# Altium PCB SFCmasterD.PcbDoc (part 1 of 7)
Units mm, origin at the board's own origin, x right, y up, seen from the top; angles counter-clockwise.
Board outline 152.4 x 101.6 mm, 2 copper layers (Top Layer, Bottom Layer); 249 components, 250 nets, 987 pads, 265 vias.
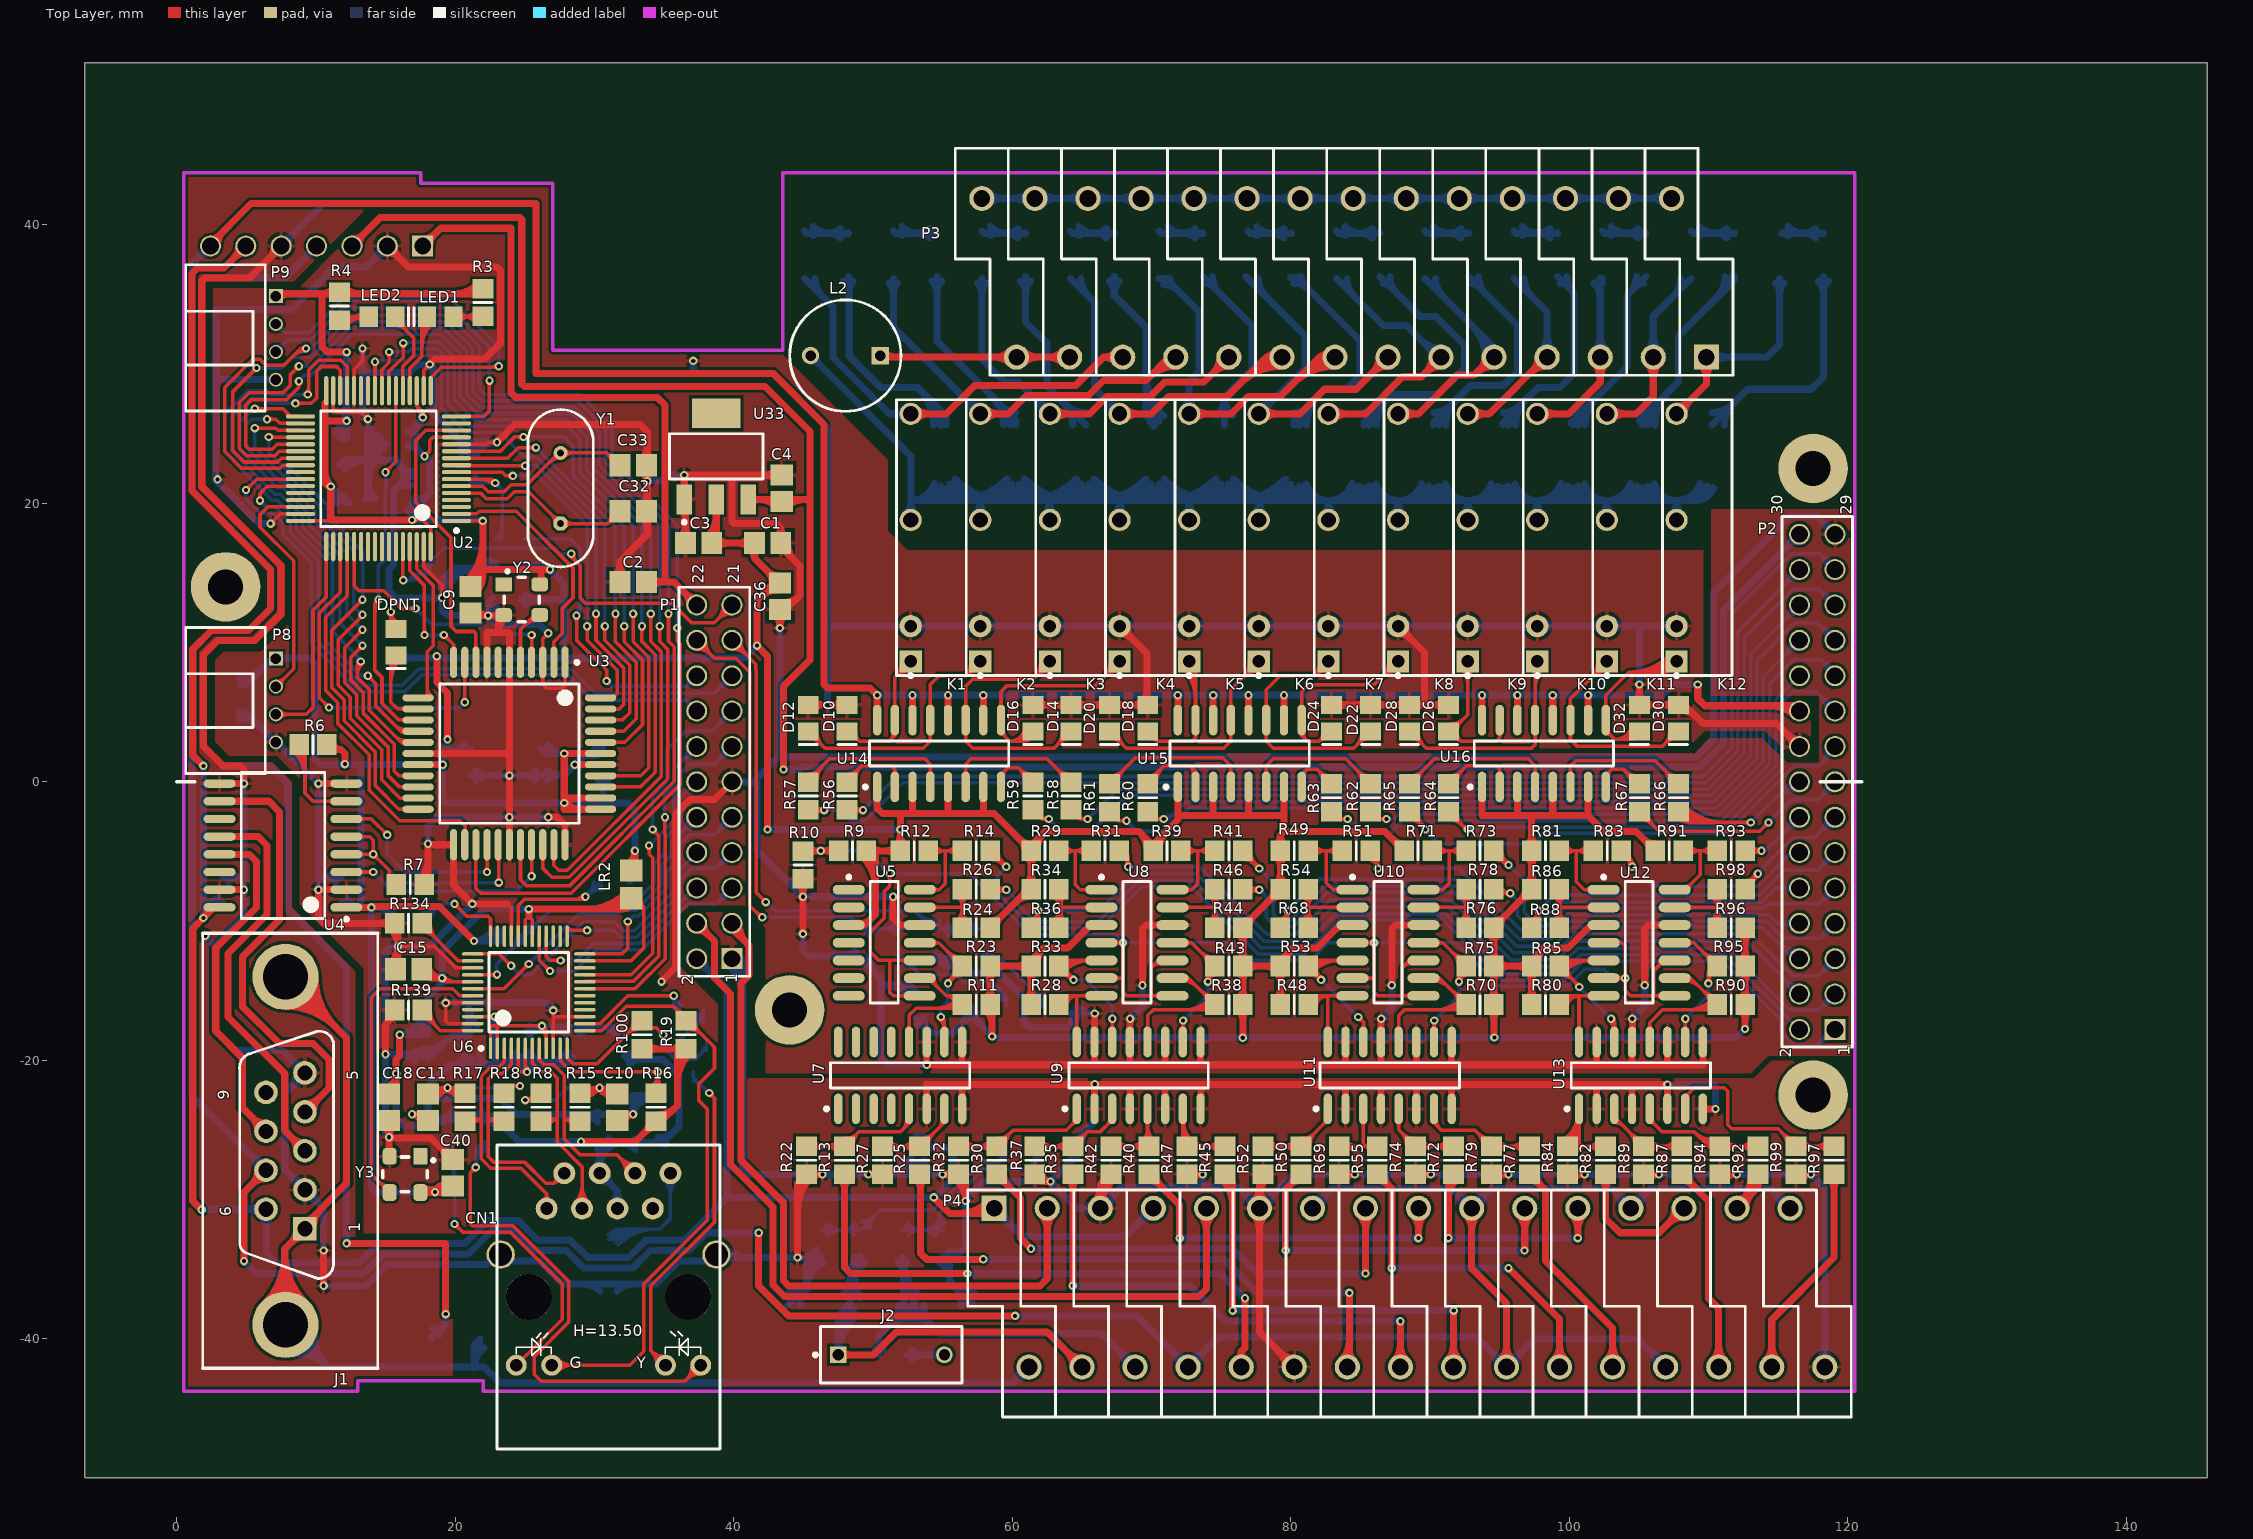
[diagram p0: Top Layer view]
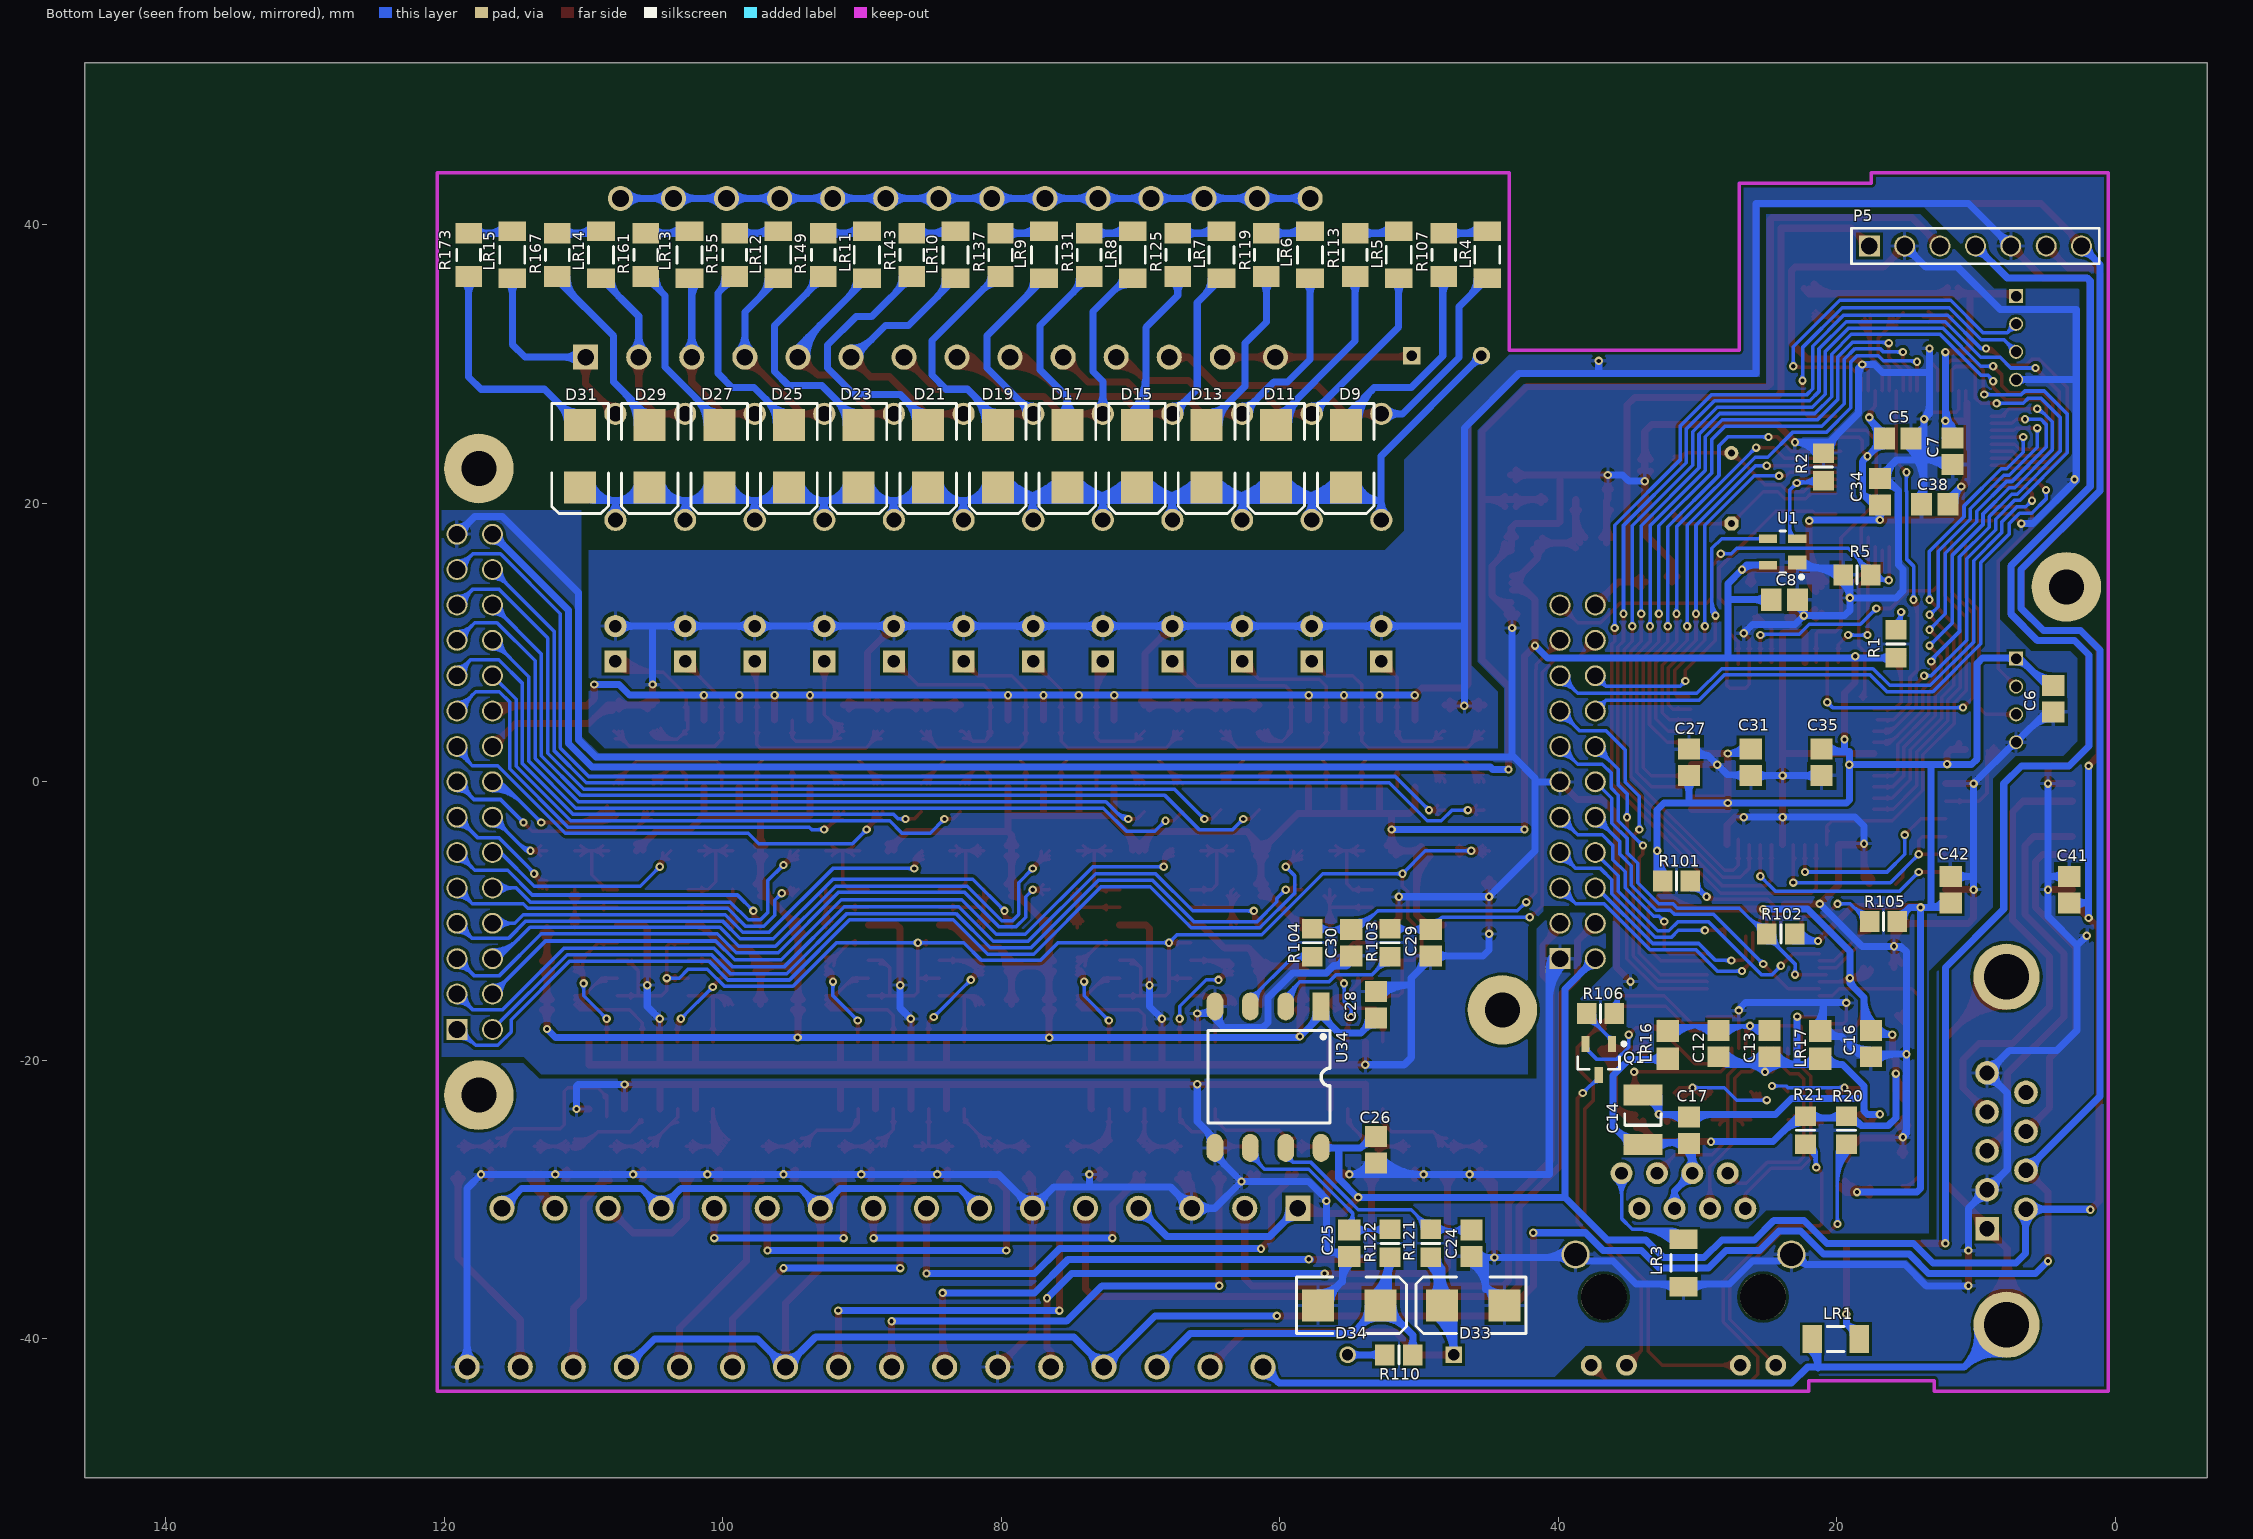
[diagram p1: Bottom Layer view, seen from below]

## Layer stack, top to bottom
Top Solder: solder mask 0.0102, Solder Resist, Dk 3.5
Top Layer: signal copper 0.0356
Dielectric 1: dielectric 0.32, FR-4, Dk 4.8
Bottom Layer: signal copper 0.0356
Bottom Solder: solder mask 0.0102, Solder Resist, Dk 3.5

## Board outline
-6.604,-49.973 145.796,-49.973 145.796,51.627 -6.604,51.627

## Design rules (kind name [scope] priority, off if disabled: settings)
Clearance Clearance_U2 [All] p1: gap=0.2
Clearance Clearance_U6 [InComponent('U6')] p2: gap=0.245
Clearance [All] p3: gap=0.254
ComponentClearance [All] p1: gap=0 collisioncheckmode=3 verticalgap=2540 showdistances=FALSE
PolygonConnect [All] p1: connectstyle=Relief reliefconductorwidth=0.254 reliefentries=4 polygonreliefangle="90 Angle" airgapwidth=0.254
RoutingVias [All] p1: holewidth=0.3 width=0.6 viastyle="Through Hole" minholewidth=0.3 minwidth=0.3 maxholewidth=0.6 maxwidth=0.6
SilkToSilkClearance [All] p1 off: silktosilkclearance=0
SilkToSolderMaskClearance [IsPad] p1 off: minsilkscreentomaskgap=0.254 clearancetoexposedcopper=TRUE
SolderMaskExpansion [All] p1: expansion=0.102
Width Width_U6 [WithinRoom('RoomDefinitionU6')] p1: maxlimit=0.25 minlimit=0.25 preferedwidth=0.25
Width Width_0.508 [InNet('3.3VPHY') or InNet('1.8VPHY') or InNet('AGND') or InNet('3.3V') or InNet('5V') or InNet('5VA') or InNet('1.8VPHY') or InNet('24V') or InNet('FG')or InNet('NetJ1_1') or InNet('GNDA') or InNet('GND') or InNet('VBAT') or InNet('VBAT_SRC') or InNet('VALVE_DRIVER_L') or InNet('VALVE_DRIVER_LO') or InNet('VALVE_DRIVER_N') or InNet('NetD1_2') or InNet('VALVE_DRIVER1_ON') or InNet('VALVE_DRIVER2_ON') or InNet('VALVE_DRIVER3_ON') or InNet('VALVE_DRIVER4_ON') or InNet('VALVE_DRIVER5_ON') or InNet('VALVE_DRIVER6_ON') or InNet('VALVE_DRIVER7_ON') or InNet('VALVE_DRIVER8_ON') or InNet('VALVE_DRIVER9_ON') or InNet('VALVE_DRIVER10_ON') or InNet('VLV_MAIN_DRIVER_ON') or InNet('VLV_DLY_DRIVER_ON')  or InNet('NetLR4_2') or InNet('NetLR5_2') or InNet('NetLR6_2') or InNet('NetLR7_2') or InNet('NetLR8_2') or InNet('NetLR9_2') or InNet('NetLR10_2') or InNet('NetLR11_2') or InNet('NetLR12_2') or InNet('NetLR13_2') or InNet('NetLR14_2') or InNet('NetLR15_2') or InNet('NetD9_1') or InNet('NetD11_1') or InNet('NetD13_1') or InNet('NetD15_1') or InNet('NetD17_1') or InNet('NetD19_1') or InNet('NetD21_1') or InNet('NetD23_1') or InNet('NetD25_1') or InNet('NetD27_1') or InNet('NetD29_1') or InNet('NetD31_1') or InNet('DETECT_PORT1') or InNet('DETECT_PORT2') or InNet('DETECT_PORT3') or InNet('DETECT_PORT4') or InNet('DETECT_PORT5') or InNet('DETECT_PORT6') or InNet('DETECT_PORT7') or InNet('DETECT_PORT8') or InNet('DETECT_PORT9') or InNet('DETECT_PORT10') or InNet('DETECT_PORT11') or InNet('DETECT_PORT12') or InNet('RMT_STARTUP_PORT') or InNet('DP_TIM_CAP_PORT') or InNet('ADC12_PORT') or InNet('ADC13_PORT') or InNet('CANH_PORT') or InNet('CANL_PORT') or InNet('NetJ2_2') or InNet('SHIELD_GND')or InNet('RTS(PIN4)')or InNet('A(PIN8-)')or InNet('B(PIN3+)')] p2: maxlimit=1.2 minlimit=0.25 preferedwidth=0.508
Width [All] p3: maxlimit=0.254 minlimit=0.25 preferedwidth=0.254
27 further rules are at their usual default settings.

## Classes and differential pairs
component class drvinput3: R48 R49 R50 R51 R52 R53 R54 R55 R68 R69 U10 U11
component class drvinput2: R38 R39 R40 R41 R42 R43 R44 R45 R46 R47
component class drvamap: C1 C2 C3 C4 C36 L2 P1 P2 P3 P4 P5 U33
component class drvcomm: C24 C25 C26 C28 C29 C30 C41 C42 D33 D34 J1 J2 LR1 R6 R7 R103 R104 R110 R121 R122 U4 U34
component class drveth: C10 C11 C12 C13 C14 C15 C16 C17 C18 C27 C40 CN1 LR2 LR3 LR16 LR17 Q1 R8 R15 R16 R17 R18 R19 R20 R21 R100 R101 R102 R105 R106 R134 R139 U6 Y3
component class drvinput0: R9 R10 R11 R12 R13 R14 R22 R23 R24 R25 R26 R27 U5 U7
component class drvinput1: R28 R29 R30 R31 R32 R33 R34 R35 R36 R37 U8 U9
component class drvoutput0: D9 D10 D11 D12 K1 K2 LR4 LR5 R56 R57 R107 R113 U14
component class drvoutput1: D13 D14 D15 D16 K3 K4 LR6 LR7 R58 R59 R119 R125
component class drvoutput2: D17 D18 D19 D20 K5 K6 LR8 LR9 R60 R61 R131 R137 U15
component class drvoutput3: D21 D22 D23 D24 K7 K8 LR10 LR11 R62 R63 R143 R149
component class drvoutput4: D25 D26 D27 D28 K9 K10 LR12 LR13 R64 R65 R155 R161 U16
component class drvoutput5: D29 D30 D31 D32 K11 K12 LR14 LR15 R66 R67 R167 R173
component class drvcomdp: C5 C6 C7 C8 C9 C31 C32 C33 C34 C35 C38 DPNT LED1 LED2 P8 P9 R1 R2 R3 R4 R5 U1 U2 U3 Y1 Y2
component class drvinput4: R70 R71 R72 R73 R74 R75 R76 R77 R78 R79
component class drvinput5: R80 R81 R82 R83 R84 R85 R86 R87 R88 R89 U12 U13
component class drvinput6: R90 R91 R92 R93 R94 R95 R96 R97 R98 R99

## Components (designator, comment, footprint, x,y, rotation, side; value= is the part's Value field where it differs from the comment)
C1 "0.1uF" CAPC2012M 42.418,17.145 r180 top
C2 "0.1uF" CAPC2012M 32.766,14.351 r180 top
C3 "10uF" CAPC2012M 37.465,17.145 r0 top
C4 "0.1uF" CAPC2012M 43.434,21.082 r90 top
C5 "0.1uF" CAPC2012M 15.621,24.647 r0 bottom
C6 "0.1uF" CAPC2012M 4.445,5.969 r90 bottom
C7 "0.1uF" CAPC2012M 11.684,23.749 r90 bottom
C8 "0.1uF" CAPC2012M 23.749,13.081 r0 bottom
C9 "0.1uF" CAPC2012M 21.082,13.081 r270 top
C10 "0.1uF" CAPC2012M 31.623,-23.368 r270 top
C11 "0.1uF" CAPC2012M 18.034,-23.368 r270 top
C12 "0.1uF" CAPC2012M 28.48,-18.796 r270 bottom
C13 "0.01uF" CAPC2012M 24.828,-18.796 r270 bottom
C14 "220uF/6.3V" CAPC3528MS 33.909,-24.257 r90 bottom
C15 "0.01uF" CAPC2012M 16.637,-13.462 r180 top
C16 "10uF" CAPC2012M 17.526,-18.796 r270 bottom
C17 "0.01uF" CAPC2012M 30.607,-25.019 r90 bottom
C18 "0.1uF" CAPC2012M 15.24,-23.368 r270 top
C24 "20pF" CAPC2012M 46.228,-33.147 r90 bottom
C25 "20pF" CAPC2012M 54.991,-33.147 r90 bottom
C26 "0.1uF" CAPC2012M 53.086,-26.416 r270 bottom
C27 "0.01uF" CAPC2012M 30.607,1.397 r90 bottom
C28 "0.1uF" CAPC2012M 53.086,-16.002 r90 bottom
C29 "20pF" CAPC2012M 49.149,-11.557 r90 bottom
C30 "20pF" CAPC2012M 54.864,-11.557 r90 bottom
C31 "0.1uF" CAPC2012M 26.162,1.397 r270 bottom
C32 "20pF" CAPC2012M 32.766,19.431 r180 top
C33 "20pF" CAPC2012M 32.766,22.733 r180 top
C34 "0.1uF" CAPC2012M 16.891,20.837 r270 bottom
C35 "0.1uF" CAPC2012M 21.082,1.397 r270 bottom
C36 "0.01uF" CAPC2012M 43.307,13.335 r90 top
C38 "0.1uF" CAPC2012M 12.954,19.939 r180 bottom
C40 "0.1uF" CAPC2012M 19.812,-28.067 r90 top
C41 "0.1uF" CAPC2012M 3.302,-7.747 r90 bottom
C42 "0.1uF" CAPC2012M 11.811,-7.747 r90 bottom
CN1 "HR911105A" HR911105A(RJ-45) 31,-35 r0 top
D9 "SMBJ440CA" SMB 55.245,23.376 r270 bottom
D10 "LL4148" CD2012-0805 48.133,4.572 r270 top
D11 "SMBJ440CA" SMB 60.244,23.376 r270 bottom
D12 "LL4148" CD2012-0805 45.339,4.572 r270 top
D13 "SMBJ440CA" SMB 65.243,23.376 r270 bottom
D14 "LL4148" CD2012-0805 64.22,4.572 r270 top
D15 "SMBJ440CA" SMB 70.243,23.376 r270 bottom
D16 "LL4148" CD2012-0805 61.468,4.572 r270 top
D17 "SMBJ440CA" SMB 75.242,23.376 r270 bottom
D18 "LL4148" CD2012-0805 69.723,4.572 r270 top
D19 "SMBJ440CA" SMB 80.241,23.376 r270 bottom
D20 "LL4148" CD2012-0805 66.971,4.572 r270 top
D21 "SMBJ440CA" SMB 85.24,23.376 r270 bottom
D22 "LL4148" CD2012-0805 85.725,4.572 r270 top
D23 "SMJ440CA" SMB 90.239,23.376 r270 bottom
D24 "LL4148" CD2012-0805 82.931,4.572 r270 top
D25 "SMBJ440CA" SMB 95.238,23.376 r270 bottom
D26 "LL4148" CD2012-0805 91.313,4.572 r270 top
D27 "SMBJ440CA" SMB 100.238,23.376 r270 bottom
D28 "LL4148" CD2012-0805 88.519,4.572 r270 top
D29 "SMBJ440CA" SMB 105.237,23.376 r270 bottom
D30 "LL4148" CD2012-0805 107.823,4.572 r270 top
D31 "SMBJ440CA" SMB 110.236,23.376 r270 bottom
D32 "LL4148" CD2012-0805 105.029,4.572 r270 top
D33 "SMB5.1CA" SMB 46.101,-37.592 r0 bottom
D34 "SMB5.1CA" SMB 54.991,-37.592 r180 bottom
DPNT "Green" CD2012-0805 15.748,10.033 r270 top
J1 "D Connector 9B" DSUB1.385-2H9BL 7.8,-26.5 r90 top locked
J2 "JP_CAN" DS-01 51.308,-41.148 r0 top
K1 "JZC-49FA/024-1H1(555)" JZC-49FA 52.696,17.534 r90 top locked
K2 "JZC-49FA/024-1H1(555)" JZC-49FA 57.696,17.534 r90 top locked
K3 "JZC-49FA/024-1H1(555)" JZC-49FA 62.696,17.534 r90 top locked
K4 "JZC-49FA/024-1H1(555)" JZC-49FA 67.696,17.534 r90 top locked
K5 "JZC-49FA/024-1H1(555)" JZC-49FA 72.696,17.534 r90 top locked
K6 "JZC-49FA/024-1H1(555)" JZC-49FA 77.696,17.534 r90 top locked
K7 "JZC-49FA/024-1H1(555)" JZC-49FA 82.696,17.534 r90 top locked
K8 "JZC-49FA/024-1H1(555)" JZC-49FA 87.696,17.534 r90 top locked
K9 "JZC-49FA/024-1H1(555)" JZC-49FA 92.696,17.534 r90 top locked
K10 "JZC-49FA/024-1H1(555)" JZC-49FA 97.696,17.534 r90 top locked
K11 "JZC-49FA/024-1H1(555)" JZC-49FA 102.696,17.534 r90 top locked
K12 "JZC-49FA/024-1H1(555)" JZC-49FA 107.696,17.534 r90 top locked
L2 "Inductor Iron" CAPPR5-8x8A 48.006,30.607 r180 top
LED1 "Green" CD2012-0805 18.923,33.401 r180 top
LED2 "Green" CD2012-0805 14.732,33.401 r0 top
LR1 "CBW321609U101T" INDC3216M 20.066,-40.005 r0 bottom
LR2 "CBW201209U102T" INDC2012M 32.639,-7.366 r270 top
LR3 "CBW321609U101T" INDC3216M 30.988,-34.544 r270 bottom
LR4 "CBW321609U101T" INDC3216M 45.085,37.846 r90 bottom
LR5 "CBW321609U101T" INDC3216M 51.45,37.846 r90 bottom
LR6 "CBW321609U101T" INDC3216M 57.816,37.846 r90 bottom
LR7 "CBW321609U101T" INDC3216M 64.181,37.846 r90 bottom
LR8 "CBW321609U101T" INDC3216M 70.547,37.846 r90 bottom
LR9 "CBW321609U101T" INDC3216M 76.912,37.846 r90 bottom
LR10 "CBW321609U101T" INDC3216M 83.277,37.846 r90 bottom
LR11 "CBW321609U101T" INDC3216M 89.643,37.846 r90 bottom
LR12 "CBW321609U101T" INDC3216M 96.008,37.846 r90 bottom
LR13 "CBW321609U101T" INDC3216M 102.373,37.846 r90 bottom
LR14 "CBW321609U101T" INDC3216M 108.739,37.846 r90 bottom
LR15 "CBW321609U101T" INDC3216M 115.104,37.846 r90 bottom
LR16 "CBW201209U102T" INDC2012M 32.131,-18.896 r90 bottom
LR17 "CBW201209U102T" INDC2012M 21.177,-18.896 r90 bottom
P1 "Header 11X2" HDR2X11 38.6,0 r90 top locked
P2 "Header 15X2" HDR2X15 117.8,0 r90 top locked
P3 "Header 14X2" DG127A-3.81-14 83.82,36.195 r180 top locked
P4 "Header 16X2" DG127A-3.81-16 88.519,-36.322 r0 top locked
P5 "Header 7" HDR1X7 10.033,38.481 r180 bottom locked
P8 "Header 4" HDR1x4H-2.0 7.112,5.842 r270 top
P9 "Header 4" HDR1x4H-2.0 7.112,31.877 r270 top
Q1 "SS8050" SOT-23_N 37.084,-19.939 r270 bottom
R1 "1K" RESC2012M 15.748,9.906 r270 bottom
R2 "100K" RESC2012M 20.955,22.606 r90 bottom
R3 "1K" RESC2012M 21.971,34.417 r270 top
R4 "1K" RESC2012M 11.684,34.163 r270 top
R5 "100K" RESC2012M 18.542,14.859 r180 bottom
R6 "10K" RESC2012M 9.779,2.667 r180 top
R7 "5.1K" RESC2012M 16.764,-7.366 r180 top
R8 "49.9R%1" RESC2012M 26.162,-23.368 r270 top
R9 "1.5K" RESC2012M 48.514,-4.953 r180 top
R10 "10K" RESC2012M 44.958,-5.969 r270 top
R11 "1K" RESC2012M 57.404,-16.002 r180 top
R12 "4.7K" RESC2012M 52.959,-4.953 r180 top
R13 "5.6K" RESC2012M 47.945,-27.178 r270 top
R14 "300R" RESC2012M 57.404,-4.953 r180 top
R15 "49.9R%1" RESC2012M 28.956,-23.368 r270 top
R16 "10K" RESC2012M 34.417,-23.368 r90 top
R17 "49.9R%1" RESC2012M 20.701,-23.368 r270 top
R18 "49.9R%1" RESC2012M 23.495,-23.368 r270 top
R19 "10K" RESC2012M 36.576,-18.161 r90 top
R20 "510" RESC2012M 19.304,-25.019 r270 bottom
R21 "510" RESC2012M 22.225,-25.019 r270 bottom
R22 "1K" RESC2012M 45.212,-27.178 r90 top
R23 "1K" RESC2012M 57.404,-13.24 r180 top
R24 "4.7K" RESC2012M 57.404,-10.477 r0 top
R25 "5.6K" RESC2012M 53.34,-27.178 r270 top
R26 "300R" RESC2012M 57.404,-7.715 r0 top
R27 "1K" RESC2012M 50.678,-27.178 r90 top
R28 "1K" RESC2012M 62.341,-16.002 r0 top
R29 "4.7K" RESC2012M 62.341,-4.953 r180 top
R30 "5.6K" RESC2012M 58.876,-27.178 r270 top
R31 "300R" RESC2012M 66.659,-4.953 r180 top
R32 "1K" RESC2012M 56.143,-27.178 r90 top
R33 "1K" RESC2012M 62.341,-13.24 r0 top
R34 "4.7K" RESC2012M 62.341,-7.715 r180 top
R35 "5.6K" RESC2012M 64.342,-27.178 r270 top
R36 "300R" RESC2012M 62.341,-10.477 r180 top
R37 "1K" RESC2012M 61.609,-27.178 r90 top
R38 "1K" RESC2012M 75.549,-16.002 r180 top
R39 "4.7K" RESC2012M 71.104,-4.953 r180 top
R40 "5.6K" RESC2012M 69.808,-27.178 r270 top
R41 "300R" RESC2012M 75.549,-4.953 r180 top
R42 "1K" RESC2012M 67.075,-27.178 r90 top
R43 "1K" RESC2012M 75.549,-13.24 r180 top
R44 "4.7K" RESC2012M 75.549,-10.477 r0 top
R45 "5.6K" RESC2012M 75.273,-27.178 r270 top
R46 "300R" RESC2012M 75.549,-7.715 r0 top
R47 "1K" RESC2012M 72.54,-27.178 r90 top
R48 "1K" RESC2012M 80.248,-16.002 r0 top
R49 "4.7K" RESC2012M 80.248,-4.953 r180 top
R50 "5.6K" RESC2012M 80.739,-27.178 r270 top
R51 "300R" RESC2012M 84.693,-4.953 r180 top
R52 "1K" RESC2012M 78.006,-27.178 r90 top
R53 "1K" RESC2012M 80.248,-13.24 r0 top
R54 "4.7K" RESC2012M 80.248,-7.715 r180 top
R55 "5.6K" RESC2012M 86.205,-27.178 r270 top
R56 "300R" RESC2012M 48.133,-1.016 r90 top
R57 "300R" RESC2012M 45.339,-1.016 r90 top
R58 "300R" RESC2012M 64.22,-1.016 r90 top
R59 "300R" RESC2012M 61.468,-1.016 r90 top
R60 "300R" RESC2012M 69.723,-1.143 r90 top
R61 "300R" RESC2012M 66.971,-1.143 r90 top
R62 "300R" RESC2012M 85.725,-1.143 r90 top
R63 "300R" RESC2012M 82.931,-1.143 r90 top
R64 "300R" RESC2012M 91.313,-1.143 r90 top
R65 "300R" RESC2012M 88.519,-1.143 r90 top
R66 "300R" RESC2012M 107.823,-1.143 r90 top
R67 "300R" RESC2012M 105.029,-1.143 r90 top
R68 "300R" RESC2012M 80.248,-10.477 r180 top
R69 "1K" RESC2012M 83.472,-27.178 r90 top
R70 "1K" RESC2012M 93.583,-16.002 r180 top
R71 "4.7K" RESC2012M 89.138,-4.953 r180 top
R72 "5.6K" RESC2012M 91.67,-27.178 r270 top
R73 "300R" RESC2012M 93.583,-4.953 r180 top
R74 "1K" RESC2012M 88.938,-27.178 r90 top
R75 "1K" RESC2012M 93.583,-13.24 r180 top
R76 "4.7K" RESC2012M 93.583,-10.477 r0 top
R77 "5.6K" RESC2012M 97.136,-27.178 r270 top
R78 "300R" RESC2012M 93.583,-7.715 r0 top
R79 "1K" RESC2012M 94.403,-27.178 r90 top
R80 "1K" RESC2012M 98.282,-16.002 r0 top
R81 "4.7K" RESC2012M 98.282,-4.953 r180 top
R82 "5.6K" RESC2012M 102.602,-27.178 r270 top
R83 "300R" RESC2012M 102.727,-4.953 r180 top
R84 "1K" RESC2012M 99.869,-27.178 r90 top
R85 "1K" RESC2012M 98.282,-13.24 r0 top
R86 "4.7K" RESC2012M 98.282,-7.715 r180 top
R87 "5.6K" RESC2012M 108.068,-27.178 r270 top
R88 "300R" RESC2012M 98.282,-10.477 r180 top
R89 "1K" RESC2012M 105.335,-27.178 r90 top
R90 "1K" RESC2012M 111.617,-16.002 r180 top
R91 "4.7K" RESC2012M 107.172,-4.953 r180 top
R92 "5.6K" RESC2012M 113.533,-27.178 r270 top
R93 "300R" RESC2012M 111.617,-4.953 r180 top
R94 "1K" RESC2012M 110.8,-27.178 r90 top
R95 "1K" RESC2012M 111.617,-13.24 r180 top
R96 "4.7K" RESC2012M 111.617,-10.477 r0 top
R97 "5.6K" RESC2012M 118.999,-27.178 r270 top
R98 "300R" RESC2012M 111.617,-7.715 r0 top
R99 "1K" RESC2012M 116.266,-27.178 r90 top
R100 "10K" RESC2012M 33.401,-18.161 r90 top
R101 "10K" RESC2012M 31.496,-7.112 r180 bottom
R102 "10K" RESC2012M 24.003,-10.922 r180 bottom
R103 "5.1R" RESC2012M 52.07,-11.557 r90 bottom
R104 "5.1R" RESC2012M 57.658,-11.557 r90 bottom
R105 "10K" RESC2012M 16.637,-10.033 r0 bottom
R106 "10K" RESC2012M 36.957,-16.637 r0 bottom
R107 "510R" RESC3216M 48.218,37.846 r270 bottom
R110 "120R" RESC2012M 51.435,-41.148 r180 bottom
R113 "510R" RESC3216M 54.583,37.846 r270 bottom
R119 "510R" RESC3216M 60.948,37.846 r270 bottom
R121 "5.1R" RESC2012M 49.149,-33.147 r90 bottom
R122 "5.1R" RESC2012M 52.07,-33.147 r90 bottom
R125 "510R" RESC3216M 67.314,37.846 r270 bottom
R131 "510R" RESC3216M 73.679,37.846 r270 bottom
R134 "10K" RESC2012M 16.637,-10.16 r0 top
R137 "510R" RESC3216M 80.045,37.846 r270 bottom
R139 "6.8K" RESC2012M 16.637,-16.383 r0 top
R143 "510R" RESC3216M 86.41,37.846 r270 bottom
R149 "510R" RESC3216M 92.775,37.846 r270 bottom
R155 "510R" RESC3216M 99.141,37.846 r270 bottom
R161 "510R" RESC3216M 105.506,37.846 r270 bottom
R167 "510R" RESC3216M 111.872,37.846 r270 bottom
R173 "510R" RESC3216M 118.237,37.846 r270 bottom
U1 "MIC811TU" SOT-143_N 23.876,16.51 r0 bottom
U2 "STM32F103RBT6" LQFP64 14.478,22.488 r180 top
U3 "VPC3+C(PQP44)" PQFP44 23.876,2.032 r270 top locked
U4 "ADM2486" RW-16_N 7.62,-4.572 r180 top
U5 "LM2901" SOIC-14AM 50.8,-11.557 r0 top
U6 "DM9161" LQFP48_L 25.273,-15.113 r90 top locked
U7 "PS2801-4" SOIC16_N 51.943,-21.082 r90 top
U8 "LM2901" SOIC-14AM 68.945,-11.557 r0 top
U9 "PS2801-4" SOIC16_N 69.068,-21.082 r90 top
U10 "LM2901" SOIC-14AM 86.979,-11.557 r0 top
U11 "PS2801-4" SOIC16_N 87.102,-21.082 r90 top
U12 "LM2901" SOIC-14AM 105.013,-11.557 r0 top
U13 "PS2801-4" SOIC16_N 105.136,-21.082 r90 top
U14 "PS2801-4" SOIC16_N 54.737,2.032 r90 top
U15 "PS2801-4" SOIC16_N 76.327,2.032 r90 top
U16 "PS2801-4" SOIC16_N 98.171,2.032 r90 top
U33 "ASM1117-3.3" SOT-223 38.735,23.368 r0 top
U34 "ISO1050DUB" SO-8LA 60.833,-21.209 r270 bottom
Y1 "8MHz@20pF" HC-49U 27.559,21.082 r90 top
Y2 "XATLS" X-CP3225 24.765,13.081 r90 top
Y3 "XATLS" X-CP3225 16.383,-28.194 r0 top

## Footprints (in the part's own frame and the unit in brackets; to place one, negate y for a bottom-side part, rotate by r counter-clockwise, add the part's x,y. Pads: shape width x height; smd on the part's side, far side on the other; paste and mask are expansions set on the pad)
CAPC2012M [mm] "Chip Capacitor, Body 2.0x1.3mm, IPC Low Density"
  rect 1.5x1.6 smd: 1(-0.95,0) 2(0.95,0)
  body extent -1.1,-0.72 1.1,0.72, height 1.1
CAPC3528MS [mm] "Chip Capacitor, Body 3.5x2.8mm, IPC Low Density"
  rect 1.5x2.8 smd: 1(-1.778,0) 2(1.778,0)
  silkscreen extent -0.4,-1.3 0.4,1.3, body extent -1.7,-1.35 1.7,1.35, height 1.35
CAPPR5-8x8A [mm] "Inductor, Electrolytic, Radial; Body 8 x 5 mm (Dia.xH typ); Pin Spacing 5 mm (typ)"
  rect 1.25x1.25 hole 0.75: 1(-2.5,0)
  round 1.25 hole 0.75: 2(2.5,0)
  silkscreen extent -4,-4 4,4
CD2012-0805 [mm] "Chip Diode; Body 2.0 x 1.3 mm (LxW typ)"
  rect 1.3x1.5 smd: 1(-0.95,0) 2(0.95,0)
  silkscreen extent 1.9,-0.65 1.9,0.65
DG127A-3.81-14 [mm] "Connector; Header; 14 Position,Pitch 3.81 mm"
  rect 1.8x1.8 hole 1.2: 1(-26.015,5.7)
  round 1.8 hole 1.2: 2(-23.515,-5.7) 3(-22.205,5.7) 4(-19.705,-5.7) 5(-18.395,5.7) 6(-15.895,-5.7) 7(-14.585,5.7) 8(-12.085,-5.7) 9(-10.775,5.7) 10(-8.275,-5.7) 11(-6.965,5.7) 12(-4.465,-5.7) 13(-3.155,5.7) 14(-0.655,-5.7) 15(0.655,5.7) 16(3.155,-5.7) 17(4.465,5.7) 18(6.965,-5.7) 19(8.275,5.7) 20(10.775,-5.7) 21(12.085,5.7) 22(14.585,-5.7) 23(15.895,5.7) 24(18.395,-5.7) 25(19.705,5.7) 26(22.205,-5.7) 27(23.515,5.7) 28(26.015,-5.7)
  silkscreen extent -27.92,-9.3 27.92,7
DG127A-3.81-16 [mm] "Connector; Header; 16 Position,Pitch 3.81 mm"
  rect 1.8x1.8 hole 1.2: 1(-29.825,5.7)
  round 1.8 hole 1.2: 2(-27.325,-5.7) 3(-26.015,5.7) 4(-23.515,-5.7) 5(-22.205,5.7) 6(-19.705,-5.7) 7(-18.395,5.7) 8(-15.895,-5.7) 9(-14.585,5.7) 10(-12.085,-5.7) 11(-10.775,5.7) 12(-8.275,-5.7) 13(-6.965,5.7) 14(-4.465,-5.7) 15(-3.155,5.7) 16(-0.655,-5.7) 17(0.655,5.7) 18(3.155,-5.7) 19(4.465,5.7) 20(6.965,-5.7) 21(8.275,5.7) 22(10.775,-5.7) 23(12.085,5.7) 24(14.585,-5.7) 25(15.895,5.7) 26(18.395,-5.7) 27(19.705,5.7) 28(22.205,-5.7) 29(23.515,5.7) 30(26.015,-5.7) 31(27.325,5.7) 32(29.825,-5.7)
  silkscreen extent -31.73,-9.3 31.73,7
DS-01 [mm] "Dial switch 2 Leads, body 3.91mm(L)x10.0mm(W)x6.6mm(H),pitch 7.62mm"
  rect 1.2x1.2 hole 0.8: 1(-3.81,0)
  round 1.2 hole 0.8: 2(3.81,0)
  silkscreen extent -5.58,-2.03 5.08,2.03
DSUB1.385-2H9BL [mm] "Connector; D Subminiature; 9 Position; Upright  Pitch 1.385 mm"
  rect 1.69x1.69 hole 1.09: 1(-5.596,-1.399)
  round 1.69 hole 1.09: 2(-2.798,-1.399) 3(0,-1.399) 4(2.798,-1.399) 5(5.596,-1.399) 6(-4.197,1.399) 7(-1.399,1.399) 8(1.399,1.399) 9(4.197,1.399)
  round 4.76 hole 3.26: 10(-12.495,0) 11(12.495,0)
  silkscreen extent -15.62,-6.63 15.62,5.94
HC-49U [mm] "Quartz Crystal, Thru-Hole; 2 Leads; Body 11.35 x 4.65 x 13.46 mm (LxWxH max)"
  oct 1x1 hole 0.5: 1(-2.54,0)
  round 1 hole 0.5: 2(2.54,0)
  silkscreen extent -5.65,-2.35 5.65,2.35
HDR1x4H-2.0 [mm] "Connector; Header; 4 Position; Right Angle,Pitch 2.0mm"
  rect 1x1 hole 0.75: 1(-3,0)
  round 1 hole 0.75: 2(-1,0) 3(1,0) 4(3,0)
  silkscreen extent -5.25,-6.48 5.25,-0.76
HDR1X7 [mm] "Connector; Header; 7 Position;Pitch 2.54mm"
  rect 1.5x1.5 hole 1.2: 1(-7.62,0)
  round 1.5 hole 1.2: 2(-5.08,0) 3(-2.54,0) 4(0,0) 5(2.54,0) 6(5.08,0) 7(7.62,0)
  silkscreen extent -8.89,-1.27 8.89,1.27
HDR2X11 [mm] "Connector; Header; 11x2 Position;Pitch 2.54mm"
  rect 1.5x1.5 hole 1.2: 1(-12.7,-1.27)
  round 1.5 hole 1.2: 2(-12.7,1.27) 3(-10.16,-1.27) 4(-10.16,1.27) 5(-7.62,-1.27) 6(-7.62,1.27) 7(-5.08,-1.27) 8(-5.08,1.27) 9(-2.54,-1.27) 10(-2.54,1.27) 11(0,-1.27) 12(0,1.27) 13(2.54,-1.27) 14(2.54,1.27) 15(5.08,-1.27) 16(5.08,1.27) 17(7.62,-1.27) 18(7.62,1.27) 19(10.16,-1.27) 20(10.16,1.27) 21(12.7,-1.27) 22(12.7,1.27)
  silkscreen extent -13.97,-2.54 13.97,2.54
HDR2X15 [mm] "Connector; Header; 15x2 Position;Pitch 2.54mm"
  rect 1.5x1.5 hole 1.2: 1(-17.78,-1.27)
  round 1.5 hole 1.2: 2(-17.78,1.27) 3(-15.24,-1.27) 4(-15.24,1.27) 5(-12.7,-1.27) 6(-12.7,1.27) 7(-10.16,-1.27) 8(-10.16,1.27) 9(-7.62,-1.27) 10(-7.62,1.27) 11(-5.08,-1.27) 12(-5.08,1.27) 13(-2.54,-1.27) 14(-2.54,1.27) 15(0,-1.27) 16(0,1.27) 17(2.54,-1.27) 18(2.54,1.27) 19(5.08,-1.27) 20(5.08,1.27) 21(7.62,-1.27) 22(7.62,1.27) 23(10.16,-1.27) 24(10.16,1.27) 25(12.7,-1.27) 26(12.7,1.27) 27(15.24,-1.27) 28(15.24,1.27) 29(17.78,-1.27) 30(17.78,1.27)
  silkscreen extent -19.05,-2.54 19.05,2.54
HR911105A(RJ-45) [mil] "Single Port RJ45 Connector wtih integated magnetics and LED for 10/100Base-TX NIC aplications"
  round 62 hole 36: 1(-175,171.46) 2(-125,271.46) 3(-75,171.46) 4(-25,271.46) 5(25,171.46) 6(75,271.46) 7(125,171.46) 8(175,271.46)
  round 59.06 hole 36: 9(-260.83,-271.46) 10(-160.83,-271.46) 11(160.83,-271.46) 12(260.83,-271.46)
  round 80 hole 65: 13(305,41.46) 14(-305,41.46)
  round 130 hole 130: HM1(225,-78.54) HM2(-225,-78.54)
  silkscreen extent -315,-509 315,351
INDC2012M [mm] "Chip Inductor, Body 2.0x1.2mm, IPC Low Density"
  rect 1.6x1.6 smd: 1(-1,0) 2(1,0)
  body extent -1.1,-0.7 1.1,0.7, height 1.1
INDC3216M [mm] "Chip Inductor, Body 3.2x1.6mm, IPC Low Density"
  rect 1.4x2 smd: 1(-1.7,0) 2(1.7,0)
  silkscreen extent -0.6,-0.9 0.6,0.9, body extent -1.75,-0.95 1.75,0.95, height 1.9
JZC-49FA [mm] "DIP; Body (LxWxH)20mmx5mmx12.5mm,4 Pins;"
  rect 1.6x1.6 hole 0.9: 1(-8.89,0)
  round 1.6 hole 1.1: 2(1.27,0) 3(8.89,0)
  round 1.6 hole 0.9: 5(-6.35,0)
  silkscreen extent -10.03,-3.98 9.91,1.02
LQFP48_L [mm] "Thin QFP, 48-Leads, Body 7x7mm, Pitch 0.5mm, IPC High Density"
  oval 1.55x0.25 smd: 1(-4.025,2.75) 2(-4.025,2.25) 3(-4.025,1.75) 4(-4.025,1.25) 5(-4.025,0.75) 6(-4.025,0.25) 7(-4.025,-0.25) 8(-4.025,-0.75) 9(-4.025,-1.25) 10(-4.025,-1.75) 11(-4.025,-2.25) 12(-4.025,-2.75) 25(4.025,-2.75) 26(4.025,-2.25) 27(4.025,-1.75) 28(4.025,-1.25) 29(4.025,-0.75) 30(4.025,-0.25) 31(4.025,0.25) 32(4.025,0.75) 33(4.025,1.25) 34(4.025,1.75) 35(4.025,2.25) 36(4.025,2.75)
  oval 0.25x1.55 smd: 13(-2.75,-4.025) 14(-2.25,-4.025) 15(-1.75,-4.025) 16(-1.25,-4.025) 17(-0.75,-4.025) 18(-0.25,-4.025) 19(0.25,-4.025) 20(0.75,-4.025) 21(1.25,-4.025) 22(1.75,-4.025) 23(2.25,-4.025) 24(2.75,-4.025) 37(2.75,4.025) 38(2.25,4.025) 39(1.75,4.025) 40(1.25,4.025) 41(0.75,4.025) 42(0.25,4.025) 43(-0.25,4.025) 44(-0.75,4.025) 45(-1.25,4.025) 46(-1.75,4.025) 47(-2.25,4.025) 48(-2.75,4.025)
  silkscreen extent -4.15,-2.85 2.85,3.55, body extent -3.5,-3.5 3.5,3.5, height 1.6
LQFP64 [mm] "Thin QFP, 64-Leads, Body 10x10mm, Pitch 0.5mm, IPC Low Density"
  oval 2.1x0.3 smd: 1(-5.6,3.75) 2(-5.6,3.25) 3(-5.6,2.75) 4(-5.6,2.25) 5(-5.6,1.75) 6(-5.6,1.25) 7(-5.6,0.75) 8(-5.6,0.25) 9(-5.6,-0.25) 10(-5.6,-0.75) 11(-5.6,-1.25) 12(-5.6,-1.75) 13(-5.6,-2.25) 14(-5.6,-2.75) 15(-5.6,-3.25) 16(-5.6,-3.75) 33(5.6,-3.75) 34(5.6,-3.25) 35(5.6,-2.75) 36(5.6,-2.25) 37(5.6,-1.75) 38(5.6,-1.25) 39(5.6,-0.75) 40(5.6,-0.25) 41(5.6,0.25) 42(5.6,0.75) 43(5.6,1.25) 44(5.6,1.75) 45(5.6,2.25) 46(5.6,2.75) 47(5.6,3.25) 48(5.6,3.75)
  oval 0.3x2.1 smd: 17(-3.75,-5.6) 18(-3.25,-5.6) 19(-2.75,-5.6) 20(-2.25,-5.6) 21(-1.75,-5.6) 22(-1.25,-5.6) 23(-0.75,-5.6) 24(-0.25,-5.6) 25(0.25,-5.6) 26(0.75,-5.6) 27(1.25,-5.6) 28(1.75,-5.6) 29(2.25,-5.6) 30(2.75,-5.6) 31(3.25,-5.6) 32(3.75,-5.6) 49(3.75,5.6) 50(3.25,5.6) 51(2.75,5.6) 52(2.25,5.6) 53(1.75,5.6) 54(1.25,5.6) 55(0.75,5.6) 56(0.25,5.6) 57(-0.25,5.6) 58(-0.75,5.6) 59(-1.25,5.6) 60(-1.75,5.6) 61(-2.25,5.6) 62(-2.75,5.6) 63(-3.25,5.6) 64(-3.75,5.6)
  silkscreen extent -5.72,-4.15 4.15,4.57
PQFP44 [mm] "QFP, 44-Leads, Body 10x10mm, Pitch 0.8mm, IPC Low Density"
  oval 2.25x0.508 smd: 1(-6.55,4) 2(-6.55,3.2) 3(-6.55,2.4) 4(-6.55,1.6) 5(-6.55,0.8) 6(-6.55,0) 7(-6.55,-0.8) 8(-6.55,-1.6) 9(-6.55,-2.4) 10(-6.55,-3.2) 11(-6.55,-4) 23(6.55,-4) 24(6.55,-3.2) 25(6.55,-2.4) 26(6.55,-1.6) 27(6.55,-0.8) 28(6.55,0) 29(6.55,0.8) 30(6.55,1.6) 31(6.55,2.4) 32(6.55,3.2) 33(6.55,4)
  oval 0.508x2.25 smd: 12(-4,-6.55) 13(-3.2,-6.55) 14(-2.4,-6.55) 15(-1.6,-6.55) 16(-0.8,-6.55) 17(0,-6.55) 18(0.8,-6.55) 19(1.6,-6.55) 20(2.4,-6.55) 21(3.2,-6.55) 22(4,-6.55) 34(4,6.55) 35(3.2,6.55) 36(2.4,6.55) 37(1.6,6.55) 38(0.8,6.55) 39(0,6.55) 40(-0.8,6.55) 41(-1.6,6.55) 42(-2.4,6.55) 43(-3.2,6.55) 44(-4,6.55)
  silkscreen extent -6.67,-5 5,5, body extent -5,-5 5,5, height 2.5
RESC2012M [mm] "Chip Resistor, Body 2.0x1.3mm, IPC Low Density"
  rect 1.4x1.5 smd: 1(-1,0) 2(1,0)
  silkscreen extent 0,-0.65 0,0.65, body extent -1.07,-0.7 1.07,0.7, height 0.65
RESC3216M [mm] "Chip Resistor, Body 3.2x1.6mm, IPC Low Density"
  rect 1.5x1.9 smd: 1(-1.55,0) 2(1.55,0)
  silkscreen extent -0.4,-0.85 0.4,0.85, body extent -1.68,-0.87 1.68,0.87, height 0.71
RW-16_N [mm] "SOIC, 16-Leads, Body 10.3x7.5mm, Pitch 1.27mm, IPC Medium Density"
  oval 2.3x0.6 smd: 1(-4.55,4.445) 2(-4.55,3.175) 3(-4.55,1.905) 4(-4.55,0.635) 5(-4.55,-0.635) 6(-4.55,-1.905) 7(-4.55,-3.175) 8(-4.55,-4.445) 9(4.55,-4.445) 10(4.55,-3.175) 11(4.55,-1.905) 12(4.55,-0.635) 13(4.55,0.635) 14(4.55,1.905) 15(4.55,3.175) 16(4.55,4.445)
  silkscreen extent -4.67,-5.25 3,5.42, body extent -3.75,-5.15 3.75,5.15, height 2.65
SMB [mm] "DO-214-AA/SMB; 2 C-Bend Leads; Body 5.3 x 3.6 mm, inc. leads (LxW)"
  rect 2.3x2.3 smd: 1(-2.25,0) 2(2.25,0)
  silkscreen extent -3.8,-2.03 4.1,2.03
SO-8LA [mm] "body=9.6mmx6.5mm(LxW),pitch=2.54mm"
  rect 2x1.2 smd: 1(-5.08,3.81)
  oval 2x1.2 smd: 2(-5.08,1.27) 3(-5.08,-1.27) 4(-5.08,-3.81) 5(5.08,-3.81) 6(5.08,-1.27) 7(5.08,1.27) 8(5.08,3.81)
  silkscreen extent -3.36,-4.32 3.3,4.45
SOIC16_N [mm] "SOIC, 16-Leads, Body 9.9x3.9mm, Pitch 1.27mm, IPC Medium Density"
  oval 2.2x0.6 smd: 1(-2.4,4.445) 2(-2.4,3.175) 3(-2.4,1.905) 4(-2.4,0.635) 5(-2.4,-0.635) 6(-2.4,-1.905) 7(-2.4,-3.175) 8(-2.4,-4.445) 9(2.4,-4.445) 10(2.4,-3.175) 11(2.4,-1.905) 12(2.4,-0.635) 13(2.4,0.635) 14(2.4,1.905) 15(2.4,3.175) 16(2.4,4.445)
  silkscreen extent -2.52,-5 0.9,5.42, body extent -2,-5 2,5, height 1.91
SOIC-14AM [mm] "SOIC, 14-Leads, Body 8.75x4mm, Pitch 1.27mm, IPC Low Density"
  oval 2.3x0.7 smd: 1(-2.55,3.81) 2(-2.55,2.54) 3(-2.55,1.27) 4(-2.55,0) 5(-2.55,-1.27) 6(-2.55,-2.54) 7(-2.55,-3.81) 8(2.55,-3.81) 9(2.55,-2.54) 10(2.55,-1.27) 11(2.55,0) 12(2.55,1.27) 13(2.55,2.54) 14(2.55,3.81)
  silkscreen extent -2.67,-4.32 1,4.83, body extent -2,-4.32 2,4.41, height 2.72
SOT-23_N [mm] "SOT23, 3-Leads, Body 2.9x1.3mm, Pitch 0.95mm, Lead Span 2.5mm, IPC Medium Density"
  rect 1.15x0.6 smd: 1(-1.125,0.95) 2(-1.125,-0.95) 3(1.125,0)
  silkscreen extent -1.25,-1.5 0.7,1.92, body extent -0.7,-1.5 0.7,1.5, height 1.1
SOT-143_N [mm] "SOT143, 4-Leads, Body 2.9x1.3mm, Pitch 1.9mm, Lead Span 2.5mm, IPC Medium Density"
  rect 1.3x1 smd: 1(-1.05,0.75)
  rect 1.3x0.6 smd: 2(-1.05,-0.95) 3(1.05,-0.95) 4(1.05,0.95)
  silkscreen extent -1.47,-1.5 0.2,1.92, body extent -0.7,-1.52 0.7,1.52, height 1.1
SOT-223 [mm] "SOT-223/SC-73; 4 Leads; Body 6.7 x 7.3 mm, inc. leads (LxW max)"
  rect 1.1x2.15 smd: 1(-2.3,-3.1) 2(0,-3.1) 3(2.3,-3.1)
  rect 3.5x2.15 smd: 4(0,3.1)
  silkscreen extent -3.35,-4.85 3.35,1.63
X-CP3225 [mm] "SMT Oscillator body 3.2mmx2.5mm"
  rrect10% 1x1.2 smd: 1(1.1,1.3)
  rrect50% 1x1.2 smd: 2(-1.1,1.3) 3(-1.1,-1.3) 4(1.1,-1.3)
  silkscreen extent -1.6,-1.25 2.13,1.25, body extent -1.6,-1.27 1.6,1.25, height 1

## Part data
C1 C2 C3 C4 C5 C6 C7 C8 C9 C10 C11 C12 C13 C15 C16 C17 C18 C24 C25 C26 C27 C28 C29 C30 C31 C32 C33 C34 C35 C36 C38 C40 C41 C42: library part Cap, "Capacitor"
C14: library part "Cap Pol1", "Polarized Capacitor (Radial)"
D9 D11 D13 D15 D17 D19 D21 D23 D25 D27 D29 D31 D33 D34: library part "Bi-dir TVS Diode", "Bi-dir TVS Diode"
D10 D12 D14 D16 D18 D20 D22 D24 D26 D28 D30 D32: library part "Diode 1N4007", "1 Amp General Purpose Rectifier"
DPNT LED1 LED2: library part LED1, "Green LED,Output indicate."
J1: "Receptacle Assembly, 9 Position, Upright"
J2: library part JK2H, "'Dial Switch pitch 7.62mm"
K1 K2 K3 K4 K5 K6 K7 K8 K9 K10 K11 K12: library part JZC-49FA, "Intermediate  Power  Relay"
L2: "Magnetic-Core Inductor"
LR1 LR2 LR3 LR4 LR5 LR6 LR7 LR8 LR9 LR10 LR11 LR12 LR13 LR14 LR15 LR16 LR17: library part BLM10/11/21/31/41, "EMI FILTERS,DC Resistance max.0.05~1.5 ohms,10 ~ 1000 ohms at 100MHz  Frequency"
P1: "Header, 11-Pin, Dual row"
P2: "Header, 15-Pin, Dual row"
P3: "Header, 14-Pin, Dual row"
P4: "Header, 16-Pin, Dual row"
P5: "Header, 7-Pin"
P8 P9: "Header, 4-Pin"
Q1: library part PMMT491A, "NPN BISS Transistor"
R1 R2 R3 R4 R5 R6 R7 R8 R9 R10 R11 R12 R13 R14 R15 R16 R17 R18 R19 R20 R21 R22 R23 R24 R25 R26 R27 R28 R29 R30 R31 R32 R33 R34 R35 R36 R37 R38 R39 R40 R41 R42 R43 R44 R45 R46 R47 R48 R49 R50 R51 R52 R53 R54 R55 R56 R57 R58 R59 R60 R61 R62 R63 R64 R65 R66 R67 R68 R69 R70 R71 R72 R73 R74 R75 R76 R77 R78 R79 R80 R81 R82 R83 R84 R85 R86 R87 R88 R89 R90 R91 R92 R93 R94 R95 R96 R97 R98 R99 R100 R101 R102 R103 R104 R105 R106 R110 R121 R122 R134 R139: library part Res1, "Resistor"
R107 R113 R119 R125 R131 R137 R143 R149 R155 R161 R167 R173: library part Res1, "Metal film Resistor"
U1: library part MAX811-EUS-T, "4-Pin 礟 Voltage Monitors with Manual Reset Input"
U2: "STM32 ARM-based 32-bit MCU with 128 Kbytes Flash, 64-pin LQFP, Industrial Temperature"
U3: "a communication chip with processor interface for  intelligent PROFIBUS DP-Slave applications"
U4: "Isolated RS-485 Transceiver"
U5 U8 U10 U12: "4通道差分比较器芯片"
U6: "网络芯片"
U7 U9 U11 U13 U14 U15 U16: "The PS2801-1 and PS2801-4 are optically coupled isolators containing a GaAs light emitting diode and an NPN  silicon phototransistor in a plastic SOP for high density applications."
U33: library part LM1117T-5.0, "800mA Low-Dropout Linear Regulator"
U34: "隔离型CAN接口芯片"
Y1: library part XTAL, "Crystal Oscillator"
Y2 Y3: "贴片有源晶振"

## Free pads (board coordinates)
  round 5 hole 2.5: 0(3.5,14) 0(44,-16.38) 0(117.5,-22.5) 0(117.5,22.5)

## Via types
v1: diameter 0.6, hole 0.3, Top Layer to Bottom Layer, 265 vias

## Nets (pads, with @x,y where several pads share a name; then routed paths per layer and width w, separated by ;. In a path a pad name is that pad's centre, name@x,y a point inside that pad or via, vN(x,y) a via of type N, cw(c..) or ccw(c..) an arc to the next point about the centre after c; other vN are vias at no path point)
1.8VPHY: C14.1 C17.1 CN1.4 CN1.5 LR16.1 | length 35.3
  Bottom Layer w0.5: CN1.4@29.985,-27.725 ccw(c29.068,-26.808) 30.365,-26.808 ccw(c31.662,-26.808) CN1.4@30.745,-27.725 ; C17.1@30.203,-26.323 cw(c29.813,-26.713) C17.1@30.365,-26.713 ; CN1.4@30.365,-28.642 cw(c30.365,-29.94) 31.282,-29.022 cw(c32.2,-28.105) CN1.4@30.902,-28.105 ; CN1.4@30.365,-27.64 cw(c32.228,-27.64) C17.1@30.911,-26.323 ; C17.1@31.011,-26.323 cw(c32.011,-27.323) 32.011,-25.908 ; C17.1@31.011,-25.615 ccw(c31.717,-24.909) 31.717,-25.908 ; CN1.5@31.261,-30.259 ccw(c30.403,-29.375) 31.635,-29.375 ; CN1.5@31.635,-30.645 31.635,-29.375 ; 31.745,-25.908 cw(c31.745,-27.549) C14.1@32.905,-26.389 ; CN1.5@32.009,-30.259 cw(c32.867,-29.375) 31.635,-29.375 ; LR16.1@32.131,-19.685 32.385,-19.939 34.925,-19.939 36.068,-21.082 36.068,-24.765 34.925,-25.908 30.541,-25.908 30.353,-26.096 30.365,-26.108 CN1.4@30.365,-28.105 31.635,-29.375 ; 32.359,-25.908 ccw(c32.359,-25.135) C14.1@32.905,-25.681 ; LR16.1@32.52,-20.285 cw(c33.355,-21.12) 33.355,-19.939 ; LR16.1@32.52,-19.507 ccw(c33.563,-18.464) 33.563,-19.939 ; C14.1@34.559,-25.535 ccw(c34.559,-23.751) 35.821,-25.012 ; C14.1@35.059,-26.035 cw(c35.689,-26.035) C14.1@35.244,-25.589